# EAGLE board 7 Gerbang Logika (IC) (EAGLE 9.7.0)

Size 309.91 x 248.48 mm. Coordinates in mm from the lower left corner, seen from the top.
Outline: 0,0 309.9,0 309.9,248.49 0,248.49 0,0
Copper layers (1*16): Top 0.035mm / dielectric 1.5mm / Bottom 0.035mm
Design rules "default": minimum track width 6mil, minimum drill 0.35mm, track to track 6mil, track to pad 6mil, pad to pad 6mil, via to via 6mil, smd to smd 6mil, copper to edge 40mil, drill to drill 6mil, minimum pad ring 10mil, minimum via ring 8mil, stop-mask expansion 4mil, vias tented up to drill 0mil, thermal gap 10mil

## Footprints (pad centres in the part's own frame; a part is rotated, then mirrored left to right if it is on the bottom)
LEDRD254W60D565H860B = drill 0.981 pad 1.581: 1 -1.27,0; 2 1.27,0
BATTERY-GENERIC = drill 1.118 pad 3.15 octagon: + 2.54,0; - -2.54,0
RESAD1016W63L850D250B = drill 0.83 pad 1.43: 1 -5.08,0; 2 5.08,0
78B04ST = drill 0.8: 1 -3.81,-3.81; 2 -1.27,-3.81; 3 1.27,-3.81; 4 3.81,-3.81; 5 3.81,3.81; 6 1.27,3.81; 7 -1.27,3.81; 8 -3.81,3.81
78F01T = drill 0.8: 1 -1.27,-3.81; 2 1.27,-3.81; 3 1.27,3.81; 4 -1.27,3.81
DIP762W53P254L1969H508Q14B = drill 0.743 pad 1.343: 1 -3.81,7.62; 2 -3.81,5.08; 3 -3.81,2.54; 4 -3.81,0; 5 -3.81,-2.54; 6 -3.81,-5.08; 7 -3.81,-7.62; 8 3.81,-7.62; 9 3.81,-5.08; 10 3.81,-2.54; 11 3.81,0; 12 3.81,2.54; 13 3.81,5.08; 14 3.81,7.62

## Placement (x,y rotation side)
D1  RED  [LEDRD254W60D565H860B]  64.87,212.43 270 top
D2  RED  [LEDRD254W60D565H860B]  174.56,217.21 270 top
D3  RED  [LEDRD254W60D565H860B]  66.77,110.24 270 top
D4  RED  [LEDRD254W60D565H860B]  177.97,110.88 270 top
D5  RED  [LEDRD254W60D565H860B]  287.36,219.01 270 top
D6  RED  [LEDRD254W60D565H860B]  287.75,111.54 270 top
D7  RED  [LEDRD254W60D565H860B]  181.46,16.45 270 top
P1  BATTERYGENERIC  [BATTERY-GENERIC]  117.95,238.44 180 top
P2  BATTERYGENERIC  [BATTERY-GENERIC]  8.26,233.65 180 top
P3  BATTERYGENERIC  [BATTERY-GENERIC]  10.16,131.47 180 top
P4  BATTERYGENERIC  [BATTERY-GENERIC]  121.36,132.1 180 top
P5  BATTERYGENERIC  [BATTERY-GENERIC]  230.75,240.23 180 top
P6  BATTERYGENERIC  [BATTERY-GENERIC]  231.13,132.77 180 top
P7  BATTERYGENERIC  [BATTERY-GENERIC]  124.85,37.67 180 top
R1  220  [RESAD1016W63L850D250B]  64.87,218.78 90 top
R2  220  [RESAD1016W63L850D250B]  174.56,223.56 90 top
R3  220  [RESAD1016W63L850D250B]  66.77,116.59 90 top
R4  220  [RESAD1016W63L850D250B]  177.97,117.23 90 top
R5  220  [RESAD1016W63L850D250B]  287.36,225.36 90 top
R6  220  [RESAD1016W63L850D250B]  287.75,117.89 90 top
R7  220  [RESAD1016W63L850D250B]  181.46,22.8 90 top
SW1  SPST-478B04ST  [78B04ST]  38.42,202.46 0 top
SW2  SPST-478B04ST  [78B04ST]  148.12,207.25 0 top
SW3  DPST78F01T  [78F01T]  39.67,102.31 0 top
SW4  SPST-478B04ST  [78B04ST]  152.6,103.96 0 top
SW5  SPST-478B04ST  [78B04ST]  261.99,212.08 0 top
SW6  SPST-478B04ST  [78B04ST]  262.37,104.62 0 top
SW7  SPST-478B04ST  [78B04ST]  156.09,9.53 0 top
U1  74HC00_PDIP  [DIP762W53P254L1969H508Q14B]  180.51,126.12 90 top
U2  74HC04_PDIP  [DIP762W53P254L1969H508Q14B]  71.85,125.48 90 top
U3  74HC02_PDIP  [DIP762W53P254L1969H508Q14B]  294.98,234.25 90 top
U4  74HC86_PDIP  [DIP762W53P254L1969H508Q14B]  290.29,126.78 90 top
U5  74HC86_PDIP  [DIP762W53P254L1969H508Q14B]  176.43,54.05 90 top
U6  74HC04_PDIP  [DIP762W53P254L1969H508Q14B]  192.04,34.7 0 top
UAND  74HC08_PDIP  [DIP762W53P254L1969H508Q14B]  67.41,227.67 90 top
UOR  74HC32_PDIP  [DIP762W53P254L1969H508Q14B]  177.1,232.45 90 top

## Library data of the parts
D1-D7 = Tinkercad; CATEGORY: Opto-Electronic; SUB-CATEGORY: LED; VALUE: LED_RED
P1-P7 R1-R7 SW1-SW7 U1-U6 UAND UOR = Tinkercad

## Nets
D1_A: D1.1 R1.1
D2_A: D2.1 R2.1
D3_A: D3.1 R3.1
D4_A: D4.1 R4.1
D5_A: D5.1 R5.1
D6_A: D6.1 R6.1
D7_A: D7.1 R7.1
P1+: P1.+ SW2.7 SW2.8 UOR.14
P1-: D2.2 P1.- UOR.7
P2+: P2.+ SW1.7 SW1.8 UAND.14
P2-: D1.2 P2.- UAND.7
P3+: P3.+ SW3.4 U2.14
P3-: D3.2 P3.- U2.7
P4+: P4.+ SW4.7 SW4.8 U1.14
P4-: D4.2 P4.- U1.7
P5+: P5.+ SW5.7 SW5.8 U3.14
P5-: D5.2 P5.- U3.7
P6+: P6.+ SW6.7 SW6.8 U4.14
P6-: D6.2 P6.- U4.7
P7+: P7.+ SW7.7 SW7.8 U5.14 U6.14
P7-: D7.2 P7.-
U1_1A: SW4.1 U1.1
U1_1B: SW4.2 U1.2
U1_1Y: R4.2 U1.3
U2_1A: SW3.1 U2.1
U2_1Y: R3.2 U2.2
U3_1A: SW5.1 U3.2
U3_1B: SW5.2 U3.3
U3_1Y: R5.2 U3.1
U4_1A: SW6.1 U4.1
U4_1B: SW6.2 U4.2
U4_1Y: R6.2 U4.3
U5_1A: SW7.1 U5.1
U5_1B: SW7.2 U5.2
U6_1A: U5.3 U6.1
U6_1Y: R7.2 U6.2
UAND_1A: SW1.1 UAND.1
UAND_1B: SW1.2 UAND.2
UAND_1Y: R1.2 UAND.3
UOR_1A: SW2.1 UOR.1
UOR_1B: SW2.2 UOR.2
UOR_1Y: R2.2 UOR.3

## Tracks (layer width: path | path; a pad name or v marks a point on that pad's centre or on a via)
D1_A  (1 unrouted)
D2_A  (1 unrouted)
D3_A  (1 unrouted)
D4_A  (1 unrouted)
D5_A  (1 unrouted)
D6_A  (1 unrouted)
D7_A  (1 unrouted)
P1+  (3 unrouted)
P1-  (2 unrouted)
P2+  (3 unrouted)
P2-  (2 unrouted)
P3+  (2 unrouted)
P3-  (2 unrouted)
P4+  (3 unrouted)
P4-  (2 unrouted)
P5+  (3 unrouted)
P5-  (2 unrouted)
P6+  (3 unrouted)
P6-  (2 unrouted)
P7+  (4 unrouted)
P7-  (1 unrouted)
U1_1A  (1 unrouted)
U1_1B  (1 unrouted)
U1_1Y  (1 unrouted)
U2_1A  (1 unrouted)
U2_1Y  (1 unrouted)
U3_1A  (1 unrouted)
U3_1B  (1 unrouted)
U3_1Y  (1 unrouted)
U4_1A  (1 unrouted)
U4_1B  (1 unrouted)
U4_1Y  (1 unrouted)
U5_1A  (1 unrouted)
U5_1B  (1 unrouted)
U6_1A  (1 unrouted)
U6_1Y  (1 unrouted)
UAND_1A  (1 unrouted)
UAND_1B  (1 unrouted)
UAND_1Y  (1 unrouted)
UOR_1A  (1 unrouted)
UOR_1B  (1 unrouted)
UOR_1Y  (1 unrouted)